# EAGLE board schema (EAGLE 7.6.0)
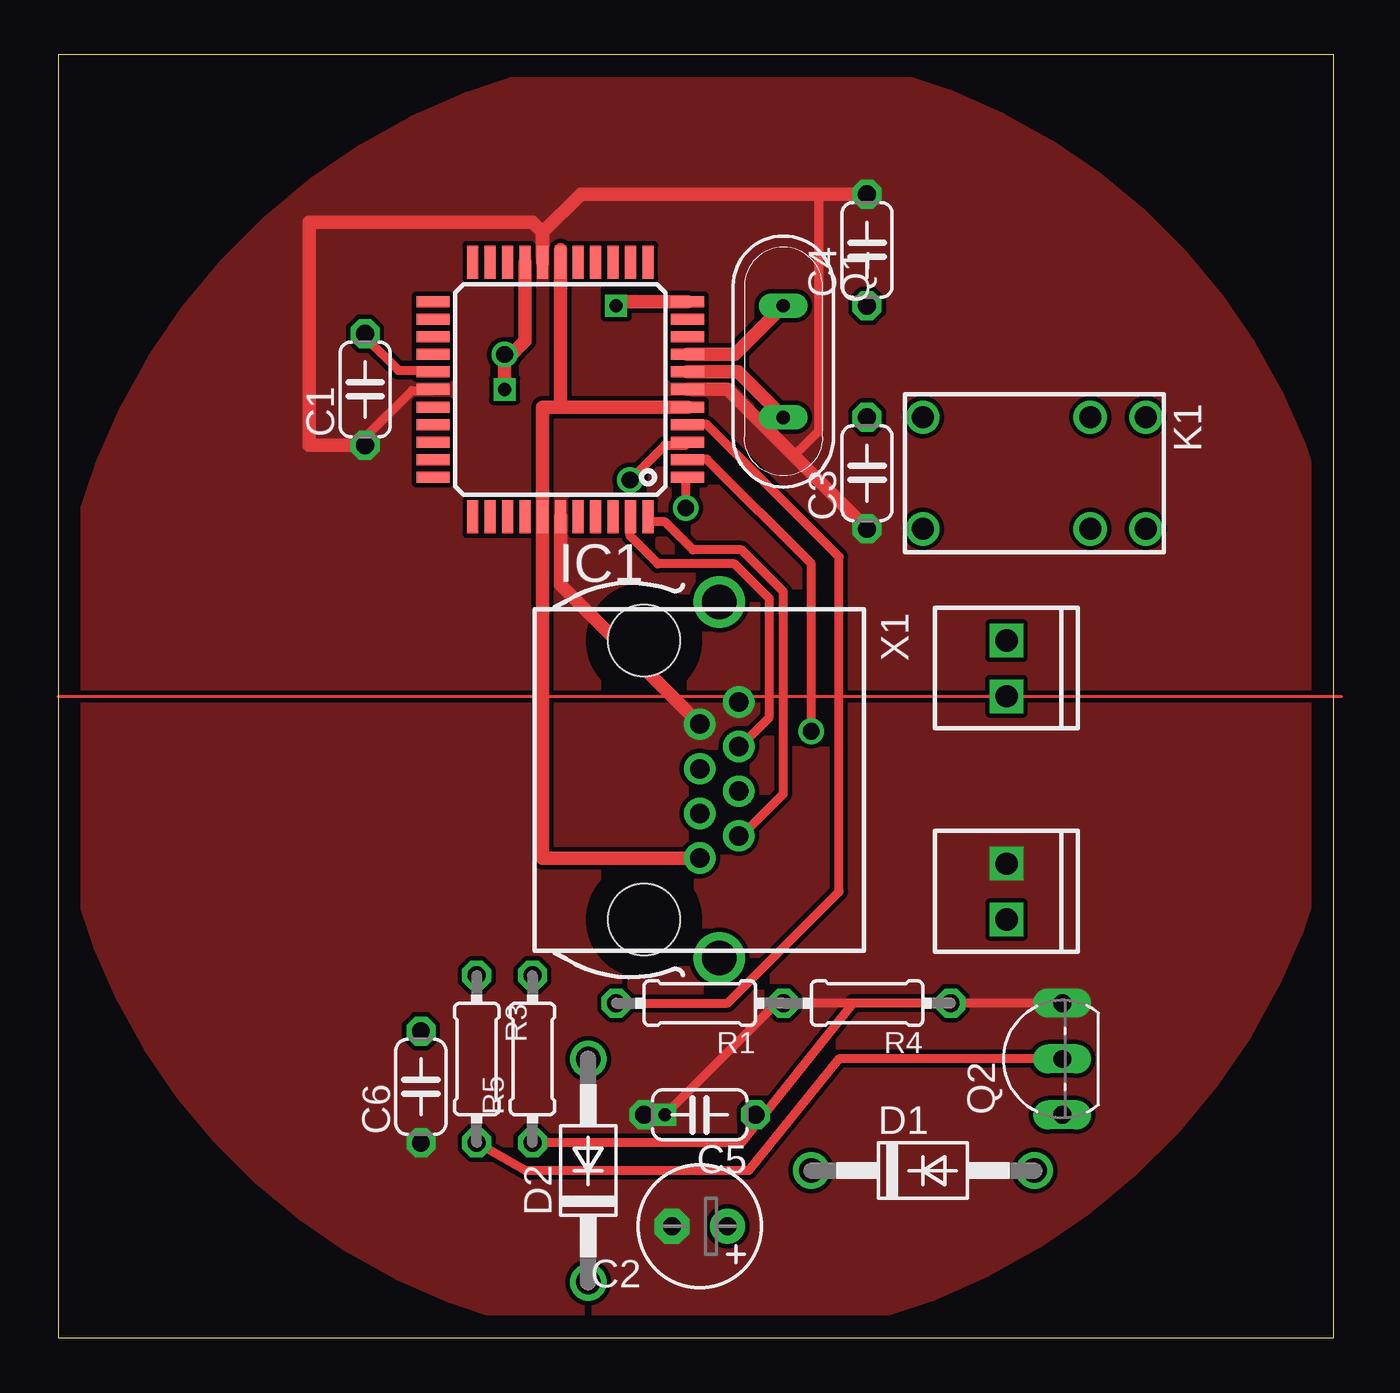
[diagram p0: board, top side]
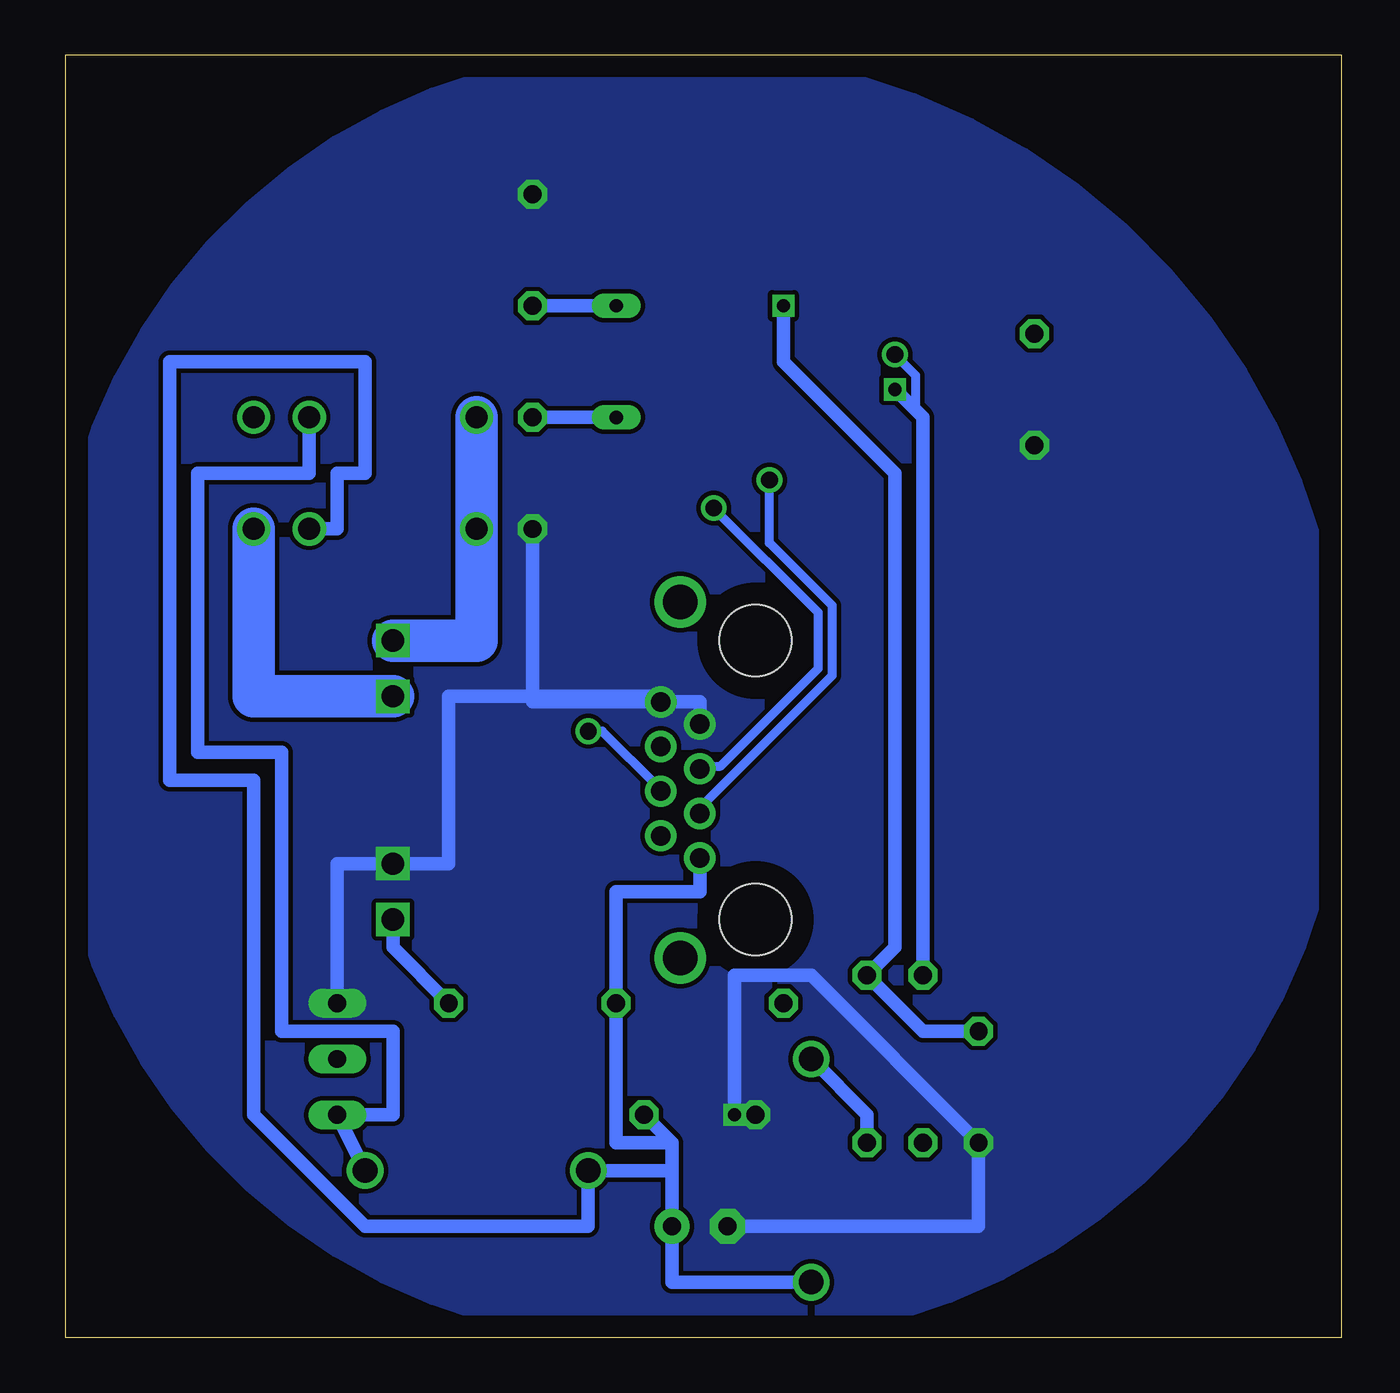
[diagram p1: board, bottom side, seen from below]

Size 58.09 x 58.41 mm. Coordinates in mm from the lower left corner, seen from the top.
Outline: 0,0 58.09,0 58.09,58.41 0,58.41 0,0
Copper layers (1*16): Top 0.035mm / dielectric 1.5mm / Bottom 0.035mm
Design rules "default *": minimum track width 16mil, minimum drill 30mil, track to track 8mil, track to pad 8mil, pad to pad 8mil, via to via 8mil, smd to smd 8mil, copper to edge 40mil, drill to drill 8mil, minimum pad ring 10mil, minimum via ring 8mil, stop-mask expansion 4mil, vias tented up to drill 0mil, thermal gap 10mil

## Footprints (pad centres in the part's own frame; a part is rotated, then mirrored left to right if it is on the bottom)
C050-024X044 = drill 0.813 octagon: 1 -2.54,0; 2 2.54,0
E2,5-6 = drill 0.813 pad 1.6: + -1.27,0 | drill 0.813 pad 1.6 octagon: - 1.27,0
DO41-10 = drill 1.118: A 5.08,0; C -5.08,0
TQFP44 = smd 1.5 x 0.5: 1 -5.8,4; 2 -5.8,3.2; 3 -5.8,2.4; 4 -5.8,1.6; 5 -5.8,0.8; 6 -5.8,0; 7 -5.8,-0.8; 8 -5.8,-1.6; 9 -5.8,-2.4; 10 -5.8,-3.2; 11 -5.8,-4; 23 5.8,-4; 24 5.8,-3.2; 25 5.8,-2.4; 26 5.8,-1.6; 27 5.8,-0.8; 28 5.8,0; 29 5.8,0.8; 30 5.8,1.6; 31 5.8,2.4; 32 5.8,3.2; 33 5.8,4 | smd 0.5 x 1.5: 12 -4,-5.8; 13 -3.2,-5.8; 14 -2.4,-5.8; 15 -1.6,-5.8; 16 -0.8,-5.8; 17 0,-5.8; 18 0.8,-5.8; 19 1.6,-5.8; 20 2.4,-5.8; 21 3.2,-5.8; 22 4,-5.8; 34 4,5.8; 35 3.2,5.8; 36 2.4,5.8; 37 1.6,5.8; 38 0.8,5.8; 39 0,5.8; 40 -0.8,5.8; 41 -1.6,5.8; 42 -2.4,5.8; 43 -3.2,5.8; 44 -4,5.8
1X02_2.54_SCREWTERM = drill 1.016 square: P1 2.54,0; P2 0,0
HY = drill 1: 1 -2.54,-2.54; 2 -2.54,2.54; C@1 5.08,2.54; C@2 5.08,-2.54; NC -5.08,-2.54; NO -5.08,2.54
QS = drill 0.61 long: 1 -2.54,0; 2 2.54,0
TO92-EBC = drill 0.813 long: B 0,-1.27; C -2.54,-1.27; E 2.54,-1.27
0204/7 = drill 0.813 octagon: 1 -3.81,0; 2 3.81,0
0446200002 = drill 0.889 pad 1.422: 1 3.556,2.54; 2 2.54,4.318; 3 1.524,2.54; 4 0.508,4.318; 5 -0.508,2.54; 6 -1.524,4.318; 7 -2.54,2.54; 8 -3.556,4.318 | drill 1.575 pad 2.286: S@1 -8.103,3.429; S@2 8.103,3.429 | hole 3.251: 6.35,0; -6.35,0

## Placement (x,y rotation side)
C1  100n  [C050-024X044]  13.97,43.18 90 top
C2  22u  [E2,5-6]  29.21,5.08 180 top
C3  22pF  [C050-024X044]  36.83,39.37 90 top
C4  22pF  [C050-024X044]  36.83,49.53 90 top
C5  100n  [C050-024X044]  29.21,10.16 180 top
C6  100n  [C050-024X044]  16.51,11.43 90 top
D1  1N4004  [DO41-10]  39.37,7.62 0 top
D2  1N4004  [DO41-10]  24.13,7.62 90 top
IC1  MEGA16-A  [TQFP44]  22.86,43.18 180 top
J1  [1X02_2.54_SCREWTERM]  43.18,21.59 270 top
J2  [1X02_2.54_SCREWTERM]  43.18,31.75 270 top
K1  HY1-5V  [HY]  44.45,39.37 180 top
Q1  12MHz  [QS]  33.02,44.45 270 top
Q2  BC546A  [TO92-EBC]  44.45,12.7 90 top
R1  10k  [0204/7]  29.21,15.24 180 top
R3  330  [0204/7]  19.05,12.7 270 top
R4  10k  [0204/7]  36.83,15.24 180 top
R5  330  [0204/7]  21.59,12.7 90 top
X1  0446200002  [0446200002]  26.67,25.4 270 top

## Library data of the parts
C1 C3-C6 = rcl
C2 R1 R3-R5 = resistor
D1 D2 = diode
IC1 = atmel; MPN: ATMEGA16-16AU; OC_FARNELL: 9171134; OC_NEWARK: 96K6515
J1 J2 = SparkFun-Connectors
K1 = relay; MF: AROMAT/ MATSUSHITA; MPN: HY1-5V; OC_FARNELL: unknown; OC_NEWARK: 10C6692
Q1 = special
Q2 = transistor-npn
X1 = con-molex; MF: MOLEX; MPN: 0446200002; OC_FARNELL: 9251910

## Nets
GND: C1.1 C2.- C3.1 C4.2 C5.2 C6.1 IC1.6 IC1.18 IC1.28 IC1.39 J1.P2 Q2.E X1.7 X1.8
INT0: C6.2 IC1.11 R5.2
MISO: IC1.2 X1.4
MOSI: IC1.1 X1.5
N$1: C3.2 IC1.7 Q1.2
N$2: C4.1 IC1.8 Q1.1
N$3: D1.A K1.1 Q2.C
N$4: Q2.B R3.2
N$5: J2.P2 K1.C@1 K1.C@2
N$6: C1.2 IC1.27
N$7: IC1.4 R1.2
N$8: J2.P1 K1.NO
N$10: IC1.19 R3.1
N$11: D2.A J1.P1 R4.1 R5.1
OINT: IC1.43 X1.6
SCK: IC1.3 X1.3
SS: IC1.44 X1.2
VCC: C2.+ C5.1 D1.C D2.C IC1.5 IC1.17 IC1.38 K1.2 R1.1 R4.2 X1.1

## Tracks (layer width: path | path; a pad name or v marks a point on that pad's centre or on a via)
GND  (via drill 0.6)
  Top 0.406: C1.1 13.97,41 16.1,43.13 17.02,43.13 IC1.28 | C5.2 v27.62,10.16 32.7,15.24 Q2.E | 33.5,40.16 34.61,41.27 34.61,52.07
  Top 0.61: IC1.18 22.06,50.33 | 22.06,50.33 21.59,50.8 11.43,50.8 11.43,40.64 C1.1 | C4.2 34.61,52.07 23.8,52.07 22.06,50.33 | C3.1 33.5,40.16 30.48,43.18 IC1.6 | IC1.39 22.86,34.29 X1.7
  Bottom 0.61: Q2.E 45.72,21.59 J1.P2 40.64,21.59 40.64,29.21 30.99,29.21 X1.8 | X1.8 36.83,28.96 C3.1 | X1.8 29.21,28.96 X1.7 | C2.- 16.51,5.08 C6.1 24.13,16.51 27.62,16.51 v27.62,10.16
  pour Top (no thermals): 0,29.21 arc-90 29.21,58.42 30.48,58.42 arc-90 58.42,30.48 58.42,29.21 arc-90 29.21,0 27.94,0 arc-90 0,27.94
  pour Bottom (no thermals): 0,27.94 arc-90 30.48,58.42 31.75,58.42 arc-90 58.42,31.75 58.42,26.67 arc-90 31.75,0 27.94,0 arc-90
INT0  (via drill 0.6)
  Top 0.61: IC1.11 25.59,47.18 v25.4,46.99
  Bottom 0.61: C6.2 19.05,13.97 R5.2 20.32,17.78 20.32,39.37 25.4,44.45 v25.4,46.99
MISO  (via drill 0.76)
  Top 0.406: v34.29,27.62 34.29,35.24 29.53,40 28.89,40 IC1.2
  Bottom 0.406: v34.29,27.62 33.65,27.62 31.11,25.08 X1.4
MOSI  (via drill 0.76)
  Top 0.406: v28.57,37.78 28.57,39.05 IC1.1
  Bottom 0.406: v28.57,37.78 23.81,33.02 23.81,30.48 28.26,26.04 29.21,26.04 X1.5
N$1
  Top 0.61: Q1.2 30.95,43.98 IC1.7
  Bottom 0.61: Q1.2 C3.2
N$2
  Top 0.61: Q1.1 30.81,44.78 IC1.8
  Bottom 0.61: Q1.1 C4.1
N$3
  Bottom 0.61: D1.A Q2.C 43.18,10.16 43.18,13.97 48.26,13.97 48.26,26.67 52.07,26.67 52.07,39.37 46.99,39.37 K1.1
N$4
  Top 0.406: R3.2 21.27,7.62 31.43,7.62 35.56,12.7 Q2.B
N$5
  Bottom 1.93: J2.P2 39.37,31.75 K1.C@1 K1.C@2
N$6
  Top 0.406: IC1.27 17.02,44.04 15.49,44.04 13.97,45.57 C1.2
N$7
  Top 0.406: R1.2 30.48,15.24 35.56,20.32 35.56,35.56 29.53,41.59 28.89,41.59 IC1.4
N$8
  Bottom 1.93: J2.P1 49.53,29.21 K1.NO
N$9  (via drill 0.6)
  other vias: 20.32,43.18
N$10  (via drill 0.76)
  Top 0.406: v20.32,44.77 20.48,44.61
  Top 0.61: IC1.19 21.26,45.39 20.48,44.61 20.32,44.45 20.32,43.18
  Bottom 0.406: v20.32,44.77 19.37,43.81 19.37,42.54 19.53,42.39
  Bottom 0.61: R3.1 19.05,41.91 19.53,42.39 20.32,43.18
N$11
  Top 0.406: R5.1 31.11,8.89 36.2,15.24 R4.1
  Bottom 0.61: R4.1 43.18,17.78 J1.P1 | R5.1 21.59,10.16 D2.A
OINT
  Top 0.406: IC1.43 26.04,37.15 26.04,36.51 27.3,35.24 30.8,35.24 32.38,33.66 32.38,28.26 31.11,26.99 X1.6
SCK  (via drill 0.76)
  Top 0.406: v26.04,39.05 27.62,40.64 28.57,40.64 IC1.3
  Bottom 0.406: v26.04,39.05 26.04,36.2 23.18,33.34 23.18,30.16 29.21,24.13 X1.3
SS
  Top 0.406: IC1.44 26.99,37.15 27.62,37.15 28.89,35.88 31.11,35.88 33.02,33.97 33.02,24.77 31.11,22.86 X1.2
VCC
  Top 0.61: X1.1 22.06,21.84 IC1.38 22.06,42.38 IC1.5 22.86,42.38 IC1.17 22.86,49.53
  Bottom 0.61: 30.48,7.62 D1.C 34.29,5.08 44.45,5.08 49.53,10.16 49.53,25.4 53.34,25.4 53.34,44.45 44.45,44.45 44.45,39.37 45.72,39.37 45.72,36.83 K1.2 | 30.48,7.62 30.48,8.89 | 30.48,8.89 C5.1 | 30.48,7.62 C2.+ 30.48,2.54 D2.C | 30.48,8.89 33.02,8.89 R4.2 33.02,20.32 29.21,20.32 X1.1
(copper drawn outside any net)
  shapes: Top area x1